# Altium PCB SiLPA.PcbDoc (part 5 of 10)
Units mm, origin at the board's own origin, x right, y up, seen from the top; angles counter-clockwise.
Board outline 222.36 x 100 mm, 4 copper layers (L1, P2, L3, L4), stack 1.598 mm thick; 583 components, 330 nets, 1692 pads, 1781 vias.
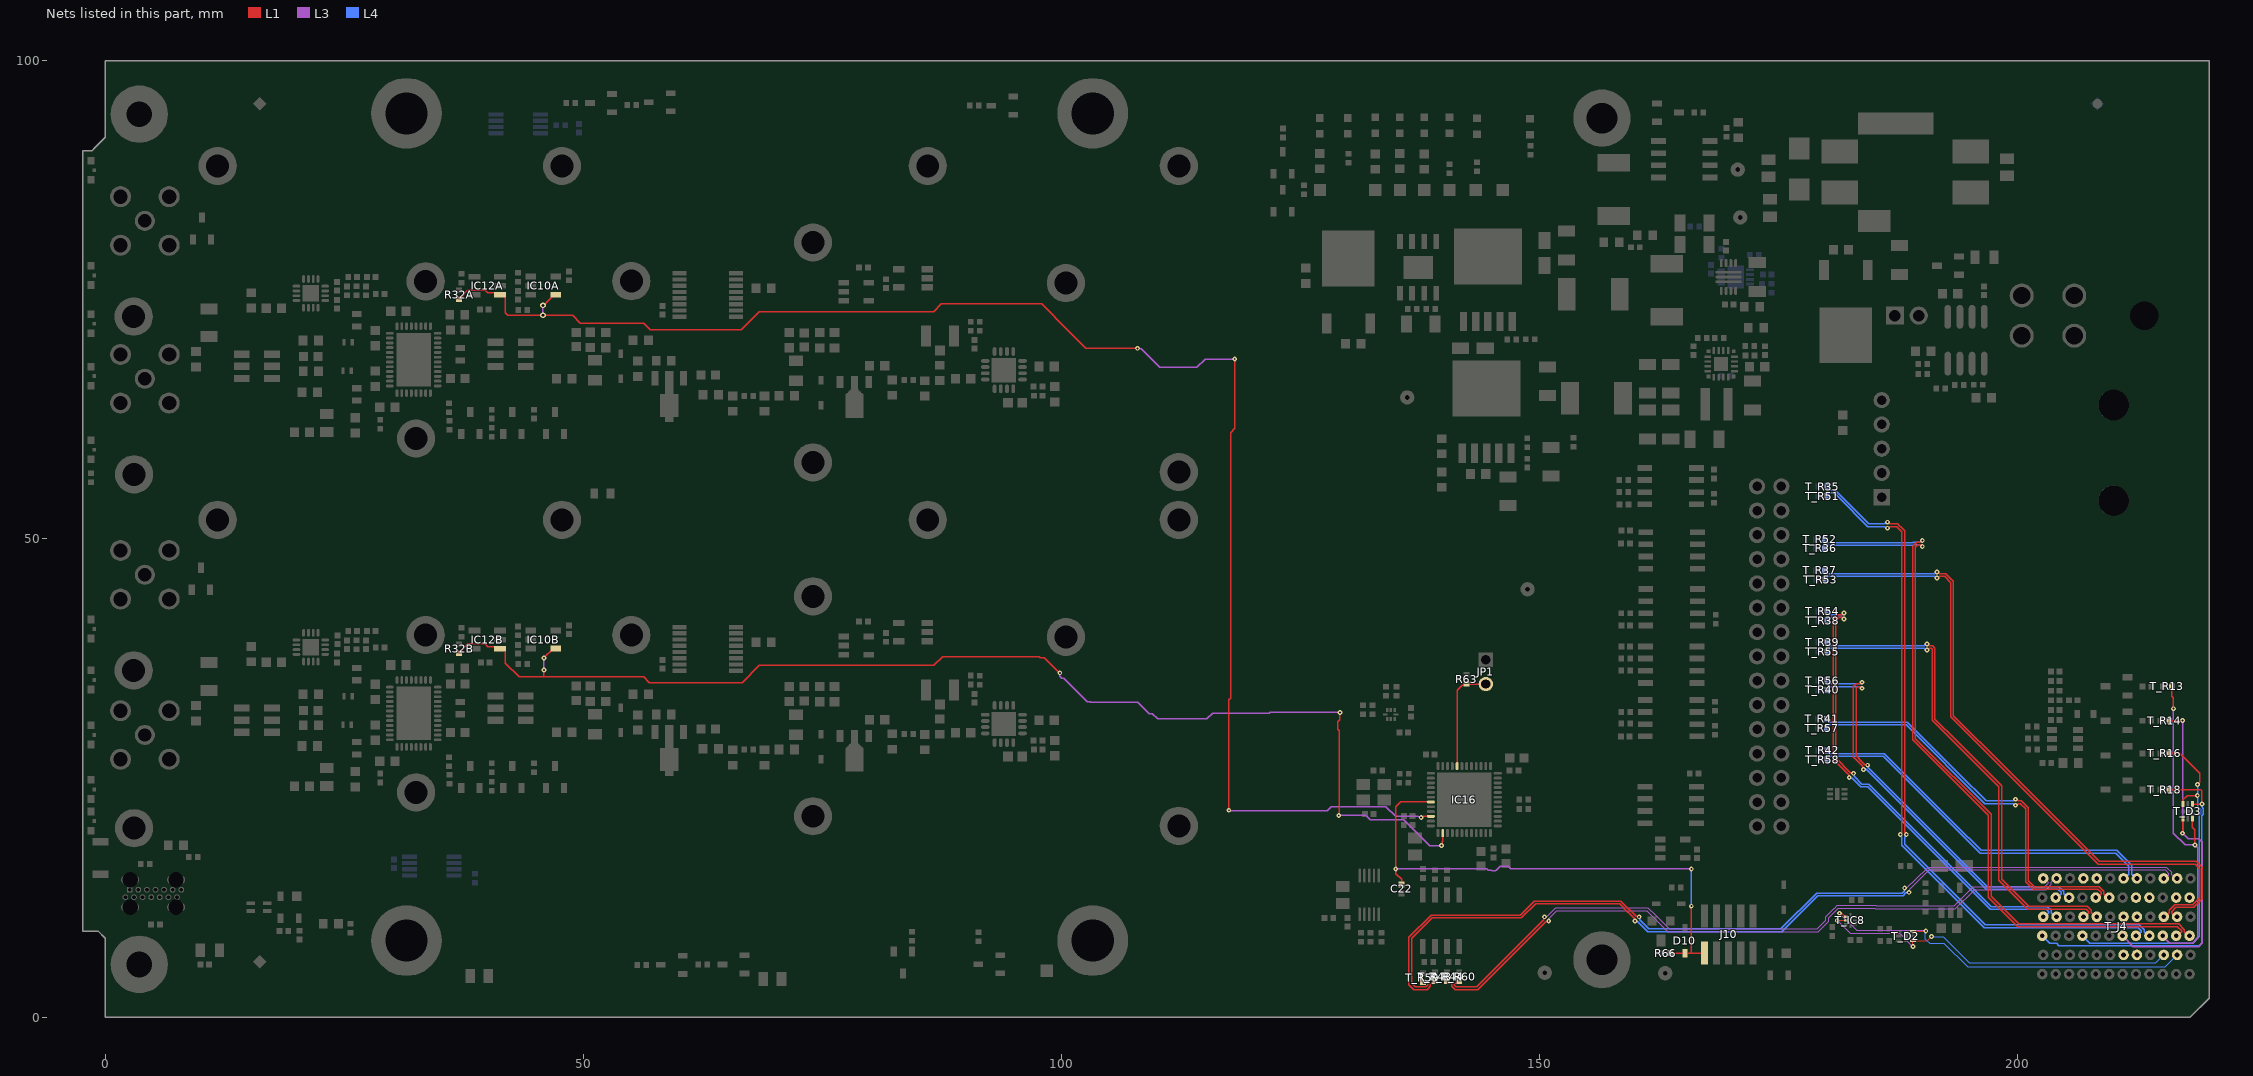
[diagram p5: the nets of this part, all layers, seen from the top]

## Via types
v1: diameter 0.5, hole 0.2, L1 to L4, tented both sides, 1301 vias
v2: diameter 0.6, hole 0.3, L1 to L4, tented both sides, 443 vias
v3: diameter 0.8, hole 0.5, L1 to L4, tented both sides, 25 vias
v4: diameter 0.5, hole 0.2, L1 to L4, 8 vias
v5: diameter 1.27, hole 0.711, L1 to L4, tented both sides, 4 vias

## Nets (pads, with @x,y where several pads share a name; then routed paths per layer and width w, separated by ;. In a path a pad name is that pad's centre, name@x,y a point inside that pad or via, vN(x,y) a via of type N, cw(c..) or ccw(c..) an arc to the next point about the centre after c; other vN are vias at no path point) (continued)
BGA3: (continued)
  L4 w0.152: T_J4.L3@202.539,8.5 203.338,7.701 204.047,7.701 204.281,7.467 218.967,7.467 219.242,7.742 219.242,21.063 219.378,21.199 219.378,21.806 219.252,21.933 219.252,22.286 v1(219.242,22.295)
BOOT0: IC16.44 JP1.2 R63.1 | length 11.3
  L1 w0.152: IC16.44@141.353,26.192 141.353,34.166 141.886,34.7 142.18,34.7 R63.1@142.336,34.856 142.366,34.826 JP1.2@144.358,34.826
BP_CLK.CLK_N: T_J4.F4
BP_CLK.CLK_P: T_J4.E4
BP_I2C.SCL: T_D2.3 T_IC8.6 T_J4.B2 | length 40.9
  L1 w0.127: v1(181.328,10.856) 181.376,10.808 181.626,10.808 181.846,10.588 181.846,10.563 181.908,10.501 T_IC8.6@182.008,10.501 ; T_D2.3@189.023,8.978 190.325,8.978 v1(190.362,9.014)
  L3 w0.127: v1(181.328,10.856) 183.125,9.058 190.318,9.058 v1(190.362,9.014)
  L4 w0.127: v1(190.362,9.014) 190.329,8.981 190.329,8.159 190.754,7.733 192.245,7.733 194.728,5.25 215.389,5.25 T_J4.B2@216.639,6.5
BP_I2C.SDA: T_D2.1 T_IC8.7 T_J4.C2 | length 38.4
  L1 w0.127: v1(181.103,10.101) T_IC8.7@182.008,10.101 ; v1(189.023,7.378) T_D2.1@189.023,7.978 190.509,7.978 v1(190.95,8.419)
  L3 w0.127: v1(181.103,10.101) 182.46,8.745 187.656,8.745 v1(189.023,7.378)
  L4 w0.127: v1(190.95,8.419) 192.165,8.419 194.904,5.68 214.419,5.68 T_J4.C2@215.239,6.5
BP_IO.LVDS_N0: T_J4.E3 T_R51.1 | length 72.3
  L1 w0.152: v1(186.351,51.123) 186.44,51.123 186.614,51.297 187.308,51.297 187.87,50.735 187.87,19.351 187.696,19.178 v1(187.696,19.088)
  L4 w0.152: T_R51.1@180.07,54.47 180.284,54.684 180.284,54.745 180.373,54.834 180.768,54.834 181.253,54.35 184.306,51.297 186.088,51.297 186.262,51.123 v1(186.351,51.123) ; v1(187.696,19.088) 187.696,18.999 187.87,18.825 187.87,17.955 196.465,9.359 212.581,9.359 212.899,9.041 212.899,8.915 212.485,8.5 T_J4.E3@212.339,8.5
BP_IO.LVDS_N1: T_J4.B3 T_R52.1 | length 74.2
  L1 w0.152: v1(190,49.841) 189.911,49.841 189.737,49.667 189.406,49.667 188.986,49.247 188.986,29.008 196.904,21.09 196.904,12.538 197.837,11.605 199.975,9.467 216.673,9.467 217.099,9.041 217.099,8.915 216.685,8.5 T_J4.B3@216.539,8.5
  L4 w0.152: T_R52.1@179.79,49.95 180.004,49.736 180.004,49.71 180.093,49.621 189,49.621 189.046,49.667 189.737,49.667 189.911,49.841 v1(190,49.841)
BP_IO.LVDS_N2: T_J4.C4 T_R53.1 | length 68.1
  L1 w0.152: v1(191.543,45.914) 191.632,45.914 191.806,46.088 192.325,46.088 192.971,45.442 192.971,31.406 194.485,29.891 208.376,16 218.545,16 219.009,15.536 219.009,12.505 218.251,11.747 216.39,11.747 215.799,11.157 215.799,10.915 215.385,10.5 T_J4.C4@215.239,10.5
  L4 w0.152: T_R53.1@179.826,45.756 180.04,45.97 180.04,46 180.129,46.089 180.749,46.089 180.75,46.088 191.28,46.088 191.453,45.914 v1(191.543,45.914)
BP_IO.LVDS_N3: T_J4.L4 T_R54.1 | length 48.1
  L1 w0.152: v1(181.813,42.253) 181.723,42.253 181.549,42.08 181.218,42.08 180.662,41.523 180.662,26.985 182.29,25.358 182.29,25.112 v1(182.353,25.049)
  L4 w0.152: T_R54.1@180.07,42.43 180.284,42.216 180.284,42.169 180.373,42.08 181.549,42.08 181.723,42.253 v1(181.813,42.253) ; v1(182.353,25.049) 182.416,24.986 182.662,24.986 183.574,24.073 184.282,24.073 197.076,11.279 202.962,11.279 203.199,11.041 203.199,10.915 202.785,10.5 T_J4.L4@202.639,10.5
BP_IO.LVDS_N4: T_J4.I4 T_R55.1 | length 50
  L1 w0.152: v1(190.475,38.386) 190.564,38.386 190.738,38.56 190.954,38.56 191.043,38.471 191.043,31.034 198,24.076 198,14.317 200.66,11.657 201.027,11.291 207.149,11.291 207.399,11.041 207.399,10.915 206.985,10.5 T_J4.I4@206.839,10.5
  L4 w0.152: T_R55.1@180.04,38.2 180.254,38.414 180.254,38.471 180.343,38.56 181.08,38.56 190.212,38.56 190.386,38.386 v1(190.475,38.386)
BP_IO.LVDS_N5: T_J4.K5 T_R56.1 | length 41
  L1 w0.152: v1(183.7,35.013) 183.611,35.013 183.437,34.839 183.106,34.839 182.796,34.529 182.796,27.192 182.959,27.028 183.432,26.555 183.777,26.21 183.777,25.964 v1(183.84,25.901)
  L4 w0.152: T_R56.1@180.07,35.178 180.284,34.965 180.284,34.928 180.373,34.839 183.611,34.839 183.7,34.928 v1(183.7,35.013) ; v1@183.84,26.147 184.096,25.891 184.159,25.891 196.676,13.375 204.165,13.375 204.499,13.041 204.499,12.915 204.085,12.5 T_J4.K5@203.939,12.5
BP_IO.LVDS_N6: T_J4.H5 T_R57.1 | length 41.6
  L1 w0.152: v1(199.75,22.155) 199.839,22.155 200.013,22.329 200.229,22.329 200.793,21.765 200.793,14.16 201.054,13.9 201.579,13.375 208.365,13.375 208.699,13.041 208.699,12.915 208.285,12.5 T_J4.H5@208.139,12.5
  L4 w0.152: T_R57.1@179.995,30.22 180.209,30.434 180.209,30.476 180.298,30.565 181.054,30.565 181.06,30.57 188.3,30.57 196.541,22.329 199.487,22.329 199.661,22.155 v1(199.75,22.155)
BP_IO.LVDS_N7: T_J4.F6 T_R58.1 | length 38
  L4 w0.152: T_R58.1@180.07,26.922 180.284,27.136 180.284,27.179 180.373,27.268 181.11,27.268 185.91,27.268 193.023,20.155 193.187,19.991 196.033,17.146 210.202,17.146 211.599,15.749 211.599,14.915 211.185,14.5 T_J4.F6@211.039,14.5
BP_IO.LVDS_N8: T_J4.C6 T_R59.1 | length 93.4
  L1 w0.152: T_R59.1@137.615,3.604 137.775,3.764 137.989,3.55 138.181,3.55 138.271,3.461 138.271,3.335 138.093,3.158 136.952,3.158 136.595,3.515 136.595,8.222 138.748,10.374 148.08,10.374 149.55,11.844 158.339,11.844 159.201,10.983 159.249,10.983 159.885,10.347 159.885,10.101 v1(159.948,10.038)
  L3 w0.127: v1(188.593,13.044) 188.663,13.114 188.663,13.342 189.376,14.055 189.388,14.055 190.723,15.389 215.397,15.389 215.787,15 215.787,14.894 215.392,14.5 T_J4.C6@215.239,14.5
  L4 w0.152: v1(159.948,10.038) 160.011,9.975 160.257,9.975 161.29,8.942 175.308,8.942 179.06,12.693 187.996,12.693 188.284,12.981 188.529,12.981 v1(188.593,13.044)
BP_IO.LVDS_N9: T_J4.L6 T_R60.1 | length 70.5
  L1 w0.152: T_R60.1@141.575,3.764 141.362,3.55 141.169,3.55 141.08,3.461 141.08,3.335 141.259,3.156 143.403,3.156 150.425,10.178 150.425,10.424 v1(150.488,10.487)
  L3 w0.127: v1(150.488,10.487) 150.559,10.558 150.787,10.558 151.667,11.438 161.3,11.438 162.105,10.633 163.518,9.22 178.994,9.22 179.906,10.132 179.906,10.51 180.8,11.404 180.823,11.404 181.098,11.68 185.146,11.68 185.188,11.638 193.338,11.638 195.329,13.629 202.815,13.629 203.187,14 203.187,14.106 202.792,14.5 T_J4.L6@202.639,14.5
BP_IO.LVDS_N10: T_J4.I6
BP_IO.LVDS_N15: T_J4.F2
BP_IO.LVDS_P0: T_J4.D3 T_R35.1 | length 72.8
  L1 w0.152: v1(186.351,51.75) 186.44,51.75 186.614,51.576 187.424,51.576 187.611,51.389 187.798,51.203 188.149,50.851 188.149,19.351 188.323,19.178 v1(188.323,19.088)
  L4 w0.152: T_R35.1@180.07,55.478 180.284,55.265 180.284,55.203 180.373,55.114 180.884,55.114 184.422,51.576 186.088,51.576 186.262,51.75 v1(186.351,51.75) ; v1(188.323,19.088) 188.323,18.999 188.149,18.825 188.149,18.071 190.281,15.939 190.471,15.749 196.581,9.639 212.696,9.639 213.179,9.157 213.179,8.915 213.593,8.5 T_J4.D3@213.739,8.5
BP_IO.LVDS_P1: T_J4.A3 T_R36.1 | length 73.7
  L1 w0.152: v1(190,49.214) 189.911,49.214 189.737,49.388 189.521,49.388 189.265,49.131 189.265,29.124 197.183,21.205 197.183,12.654 197.953,11.885 199.353,10.485 199.448,10.39 200.09,9.747 216.788,9.747 217.379,9.157 217.379,8.915 217.793,8.5 T_J4.A3@217.939,8.5
  L4 w0.152: T_R36.1@179.82,49 180.034,49.214 180.034,49.252 180.123,49.342 189.116,49.342 189.162,49.388 189.737,49.388 189.911,49.214 v1(190,49.214)
BP_IO.LVDS_P2: T_J4.B4 T_R37.1 | length 68.6
  L1 w0.152: v1(191.543,46.541) 191.632,46.541 191.806,46.368 192.441,46.368 192.696,46.112 193.25,45.558 193.25,31.522 194.601,30.17 195.905,28.867 196,28.772 208.492,16.279 218.661,16.279 219.288,15.652 219.288,12.389 218.367,11.467 216.505,11.467 216.079,11.041 216.079,10.915 216.493,10.5 T_J4.B4@216.639,10.5
  L4 w0.152: T_R37.1@179.82,46.7 180.034,46.486 180.034,46.458 180.123,46.369 180.864,46.369 180.866,46.368 191.28,46.368 191.453,46.541 v1(191.543,46.541)
BP_IO.LVDS_P3: T_J4.K4 T_R38.1 | length 47.7
  L1 w0.152: v1(181.813,41.627) 181.723,41.627 181.549,41.8 181.334,41.8 180.941,41.408 180.941,27.101 182.487,25.555 182.733,25.555 v1(182.796,25.492)
  L4 w0.152: T_R38.1@180.07,41.45 180.284,41.664 180.284,41.711 180.373,41.8 181.549,41.8 181.723,41.627 v1(181.813,41.627) ; v1(182.796,25.492) 182.859,25.429 182.859,25.183 183.69,24.353 184.397,24.353 188.717,20.033 188.812,19.938 197.192,11.558 201.832,11.558 203.077,11.558 203.479,11.157 203.479,10.915 203.893,10.5 T_J4.K4@204.039,10.5
BP_IO.LVDS_P4: T_J4.H4 T_R39.1 | length 50.5
  L1 w0.152: v1(190.475,39.013) 190.564,39.013 190.738,38.84 191.069,38.84 191.322,38.587 191.322,37.793 191.322,31.149 192.404,30.068 192.499,29.973 198.279,24.192 198.279,14.433 200.763,11.95 201.142,11.57 207.265,11.57 207.679,11.157 207.679,10.915 208.093,10.5 T_J4.H4@208.239,10.5
  L4 w0.152: T_R39.1@180.04,39.2 180.254,38.986 180.254,38.929 180.343,38.84 180.964,38.84 190.212,38.84 190.386,39.013 v1(190.475,39.013)
BP_IO.LVDS_P5: T_J4.J5 T_R40.1 | length 40.4
  L1 w0.152: v1(183.7,34.386) 183.611,34.386 183.437,34.559 183.221,34.559 183.075,34.413 183.075,27.307 183.711,26.671 183.974,26.408 184.22,26.408 v1(184.283,26.345)
  L4 w0.152: T_R40.1@180.07,34.22 180.284,34.434 180.284,34.47 180.373,34.559 183.611,34.559 183.7,34.47 v1(183.7,34.386) ; v1(184.283,26.345) 184.35,26.278 184.35,26.096 196.792,13.654 204.281,13.654 204.779,13.157 204.779,12.915 205.193,12.5 T_J4.J5@205.339,12.5
BP_IO.LVDS_P6: T_J4.G5 T_R41.1 | length 42
  L1 w0.152: v1(199.75,22.782) 199.839,22.782 200.013,22.608 200.344,22.608 201.073,21.88 201.073,14.276 201.441,13.907 201.694,13.654 208.481,13.654 208.979,13.157 208.979,12.915 209.393,12.5 T_J4.G5@209.539,12.5
  L4 w0.152: T_R41.1@180.02,31.2 180.234,30.986 180.234,30.934 180.323,30.845 180.939,30.845 180.944,30.85 188.416,30.85 193.708,25.557 193.899,25.367 196.657,22.608 199.487,22.608 199.661,22.782 v1(199.75,22.782)
BP_IO.LVDS_P7: T_J4.E6 T_R42.1 | length 38.5
  L4 w0.152: T_R42.1@180.07,27.894 180.284,27.681 180.284,27.637 180.373,27.548 180.994,27.548 186.026,27.548 193.466,20.107 196.148,17.425 210.318,17.425 211.879,15.864 211.879,14.915 212.293,14.5 T_J4.E6@212.439,14.5
BP_IO.LVDS_P8: T_J4.B6 T_R43.1 | length 95.3
  L1 w0.152: T_R43.1@138.889,3.6 T_R43.1@139.053,3.764 ; T_R43.1@139.045,3.764 138.832,3.55 138.639,3.55 138.55,3.461 138.55,3.219 138.209,2.878 136.836,2.878 136.315,3.399 136.315,8.337 138.632,10.654 147.964,10.654 149.434,12.124 158.455,12.124 159.316,11.262 159.365,11.262 160.082,10.545 160.328,10.545 v1(160.391,10.482)
  L3 w0.127: v1(188.149,13.487) 188.22,13.558 188.448,13.558 189.249,14.36 189.262,14.36 190.596,15.694 215.523,15.694 216.091,15.126 216.091,14.894 216.486,14.5 T_J4.B6@216.639,14.5
  L4 w0.152: v1(160.391,10.482) 160.454,10.419 160.454,10.173 161.406,9.221 175.193,9.221 178.944,12.972 187.88,12.972 188.086,13.178 188.086,13.424 v1(188.149,13.487)
BP_IO.LVDS_P9: T_J4.K6 T_R44.1 | length 71.4
  L1 w0.152: T_R44.1@140.305,3.764 140.519,3.55 140.711,3.55 140.801,3.461 140.801,3.219 141.144,2.876 143.518,2.876 150.623,9.981 150.869,9.981 v1(150.932,10.044)
  L3 w0.127: v1(150.932,10.044) 151.002,10.114 151.002,10.342 151.793,11.133 161.174,11.133 161.979,10.328 163.392,8.915 179.12,8.915 180.211,10.005 180.211,10.384 180.926,11.099 180.949,11.099 181.225,11.375 185.02,11.375 185.061,11.333 193.464,11.333 195.455,13.324 202.942,13.324 203.491,13.874 203.491,14.106 203.886,14.5 T_J4.K6@204.039,14.5
BP_IO.LVDS_P10: T_J4.H6
BP_IO.LVDS_P15: T_J4.E2
BP_MGT_Rx_N: T_J4.E5
BP_MGT_Rx_P: T_J4.D5
BP_MGT_Tx_N: T_J4.B5
BP_MGT_Tx_P: T_J4.A5
CPU_nRST: C22.2 D10.2 IC16.7 J10.10 R66.2 | length 56
  L1 w0.152: C22.2@135.54,13.846 135.54,14.389 134.94,14.988 v1(134.94,15.489) 134.937,15.493 134.937,21.97 135.459,22.492 137.559,22.492 137.562,22.495 137.979,22.495 137.982,22.492 IC16.7@138.653,22.492 ; R66.2@163.622,6.689 D10.2@165.182,6.689 165.832,6.689 ; v1(165.846,11.6) 165.846,6.703 165.832,6.689 ; J10.10@167.2,6.689 165.832,6.689
  L3 w0.152: v1(134.94,15.489) 143.617,15.489 143.657,15.529 144.427,15.529 144.619,15.337 144.957,15.337 144.972,15.321 145.389,15.321 145.404,15.337 145.428,15.337 145.877,15.786 146.686,15.786 146.983,15.489 v1(165.844,15.489)
  L4 w0.152: v1(165.844,15.489) 165.844,11.602 v1(165.846,11.6)